# EAGLE board eeZeeRGBTestJig (EAGLE 6.4)
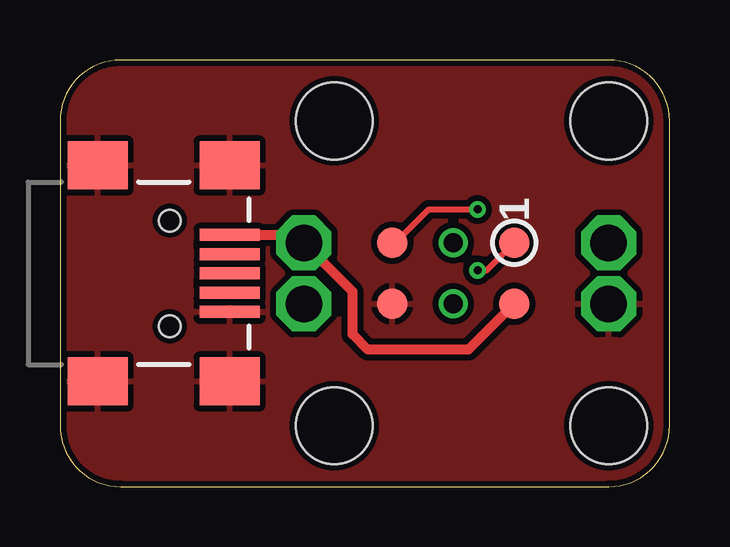
[diagram p0: board, top side]
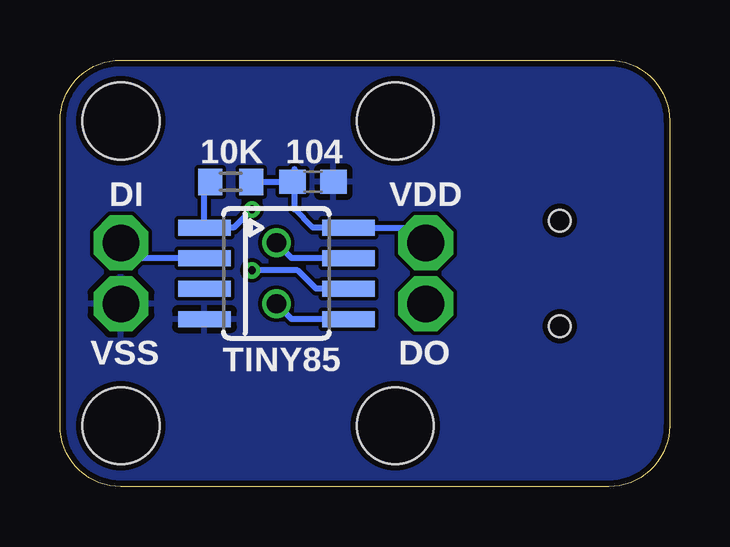
[diagram p1: board, bottom side, seen from below]

Size 25.4 x 17.78 mm. Coordinates in mm from the lower left corner, seen from the top.
Outline: 0,15.24 0,2.54 arc90 2.54,0 22.86,0 arc90 25.4,2.54 25.4,15.24 arc90 22.86,17.78 2.54,17.78 arc90 0,15.24
Copper layers (1*16): Top 0.0356mm / dielectric 1.5011mm / Bottom 0.0356mm
Design rules "LaenPCBOrder *": minimum track width 6mil, minimum drill 13mil, track to track 6mil, track to pad 6mil, pad to pad 6mil, via to via 6mil, smd to smd 6mil, copper to edge 10mil, drill to drill 6mil, minimum pad ring 7mil, minimum via ring 7mil, stop-mask expansion 3mil, vias tented up to drill 20mil, thermal gap 10mil
Holes 3.2 mm at 22.86,15.24 22.86,2.54 11.43,15.24 11.43,2.54

## Footprints (pad centres in the part's own frame; a part is rotated, then mirrored left to right if it is on the bottom)
C0603 = smd 1.1 x 1: 1 -0.85,0; 2 0.85,0
PAD_060 = drill 1.524 octagon: P$1 0,0
SOIC8N = smd 0.66 x 2.2: 1 -1.905,-3; 2 -0.635,-3; 3 0.635,-3; 4 1.905,-3; 5 1.905,3; 6 0.635,3; 7 -0.635,3; 8 -1.905,3
2X3_TP = smd 1.27 x 1.27: 1 -1.27,2.54; 2 1.27,2.54; 5 -1.27,-2.54; 6 1.27,-2.54 | drill 0.8: 3 -1.27,0; 4 1.27,0
R0603 = smd 1 x 1.1: 1 -0.85,0; 2 0.85,0
USB-MINIB = smd 2.5 x 0.5: D+ 2.5,0; D- 2.5,0.8; GND 2.5,-1.6; ID 2.5,-0.8; VBUS 2.5,1.6 | smd 2.5 x 2: MTN1 -3,4.5; MTN2 2.5,4.5; MTN3 -3,-4.5; MTN4 2.5,-4.5 | hole 0.9: 0,2.2; 0,-2.2

## Placement (x,y rotation side)
C1  104  [C0603]  14.86,12.7 0 bottom
DI  060  [PAD_060]  22.86,10.16 0 bottom
DO  WIREPAD_060  [PAD_060]  10.16,7.62 180 bottom
IC1  TINY85  [SOIC8N]  16.38,8.89 270 bottom
J1  AVRISP6_TP  [2X3_TP]  16.38,8.89 270 top
R1  10K  [R0603]  18.29,12.7 0 bottom
U$1  USB-MINIB-5PIN  [USB-MINIB]  4.57,8.89 0 top
VDD  060  [PAD_060]  10.16,10.16 180 bottom
VSS  060  [PAD_060]  22.86,7.62 0 bottom

## Library data of the parts
C1 = rcl
DI DO VDD VSS = bt_electromech
IC1 J1 = bt_avr
R1 = resistor
U$1 = SparkFun

## Nets
!RESET: IC1.1 J1.5 R1.1
GND: C1.2 IC1.4 J1.6 U$1.GND U$1.MTN1 U$1.MTN2 U$1.MTN3 U$1.MTN4 VSS.P$1
N$1: IC1.5 J1.4
N$2: IC1.6 J1.1
N$3: IC1.7 J1.3
N$5: DI.P$1 IC1.2
VDD: C1.1 IC1.8 J1.2 R1.2 U$1.VBUS VDD.P$1

## Tracks (layer width: path | path; a pad name or v marks a point on that pad's centre or on a via)
!RESET  (via drill 0.33)
  Top 0.254: J1.5 13.97,10.16 15.37,11.56 v17.4,11.56
  Bottom 0.254: R1.1 19.38,13.09 IC1.1 18.16,10.79 v17.4,11.56
GND
  pour Top (isolate 0.254): 2.54,17.78 22.86,17.78 arc-90 25.4,15.24 25.4,2.54 arc-90 22.86,0 2.54,0 arc-90 0,2.54 0,15.24 arc-90
  pour Bottom: 2.54,17.78 22.86,17.78 arc-90 25.4,15.24 25.4,2.54 arc-90 22.86,0 2.54,0 arc-90 0,2.54 0,15.24 arc-90
N$1
  Bottom 0.254: IC1.5 15.75,6.99 J1.4
N$2  (via drill 0.33)
  Top 0.254: v17.4,9.02 17.78,9.02 J1.1
  Bottom 0.254: IC1.6 14.73,8.26 15.49,9.02 v17.4,9.02
N$3
  Bottom 0.254: IC1.7 15.75,9.53 J1.3
N$5
  Bottom 0.254: IC1.2 22.23,9.53 DI.P$1
VDD
  Top 0.406: U$1.VBUS 9.83,10.49 VDD.P$1 12.19,8.13 12.19,6.35 12.83,5.71 17.02,5.71 J1.2
  Bottom 0.254: R1.2 C1.1 15.62,13.25 15.62,11.56 14.86,10.79 IC1.8 10.79,10.79 VDD.P$1

## Text on the board
tsilk: 1
bsilk: 104 | 10K | VDD | DI | DO | TINY85 | VSS